# Altium PCB USBHUB.PcbDoc
Units mm, origin at the board's own origin, x right, y up, seen from the top; angles counter-clockwise.
Board outline 100 x 100 mm, 2 copper layers (Top Layer, Bottom Layer); 299 components, 113 nets, 845 pads, 26 vias.
Unrouted connection lines stored in the file: 500.
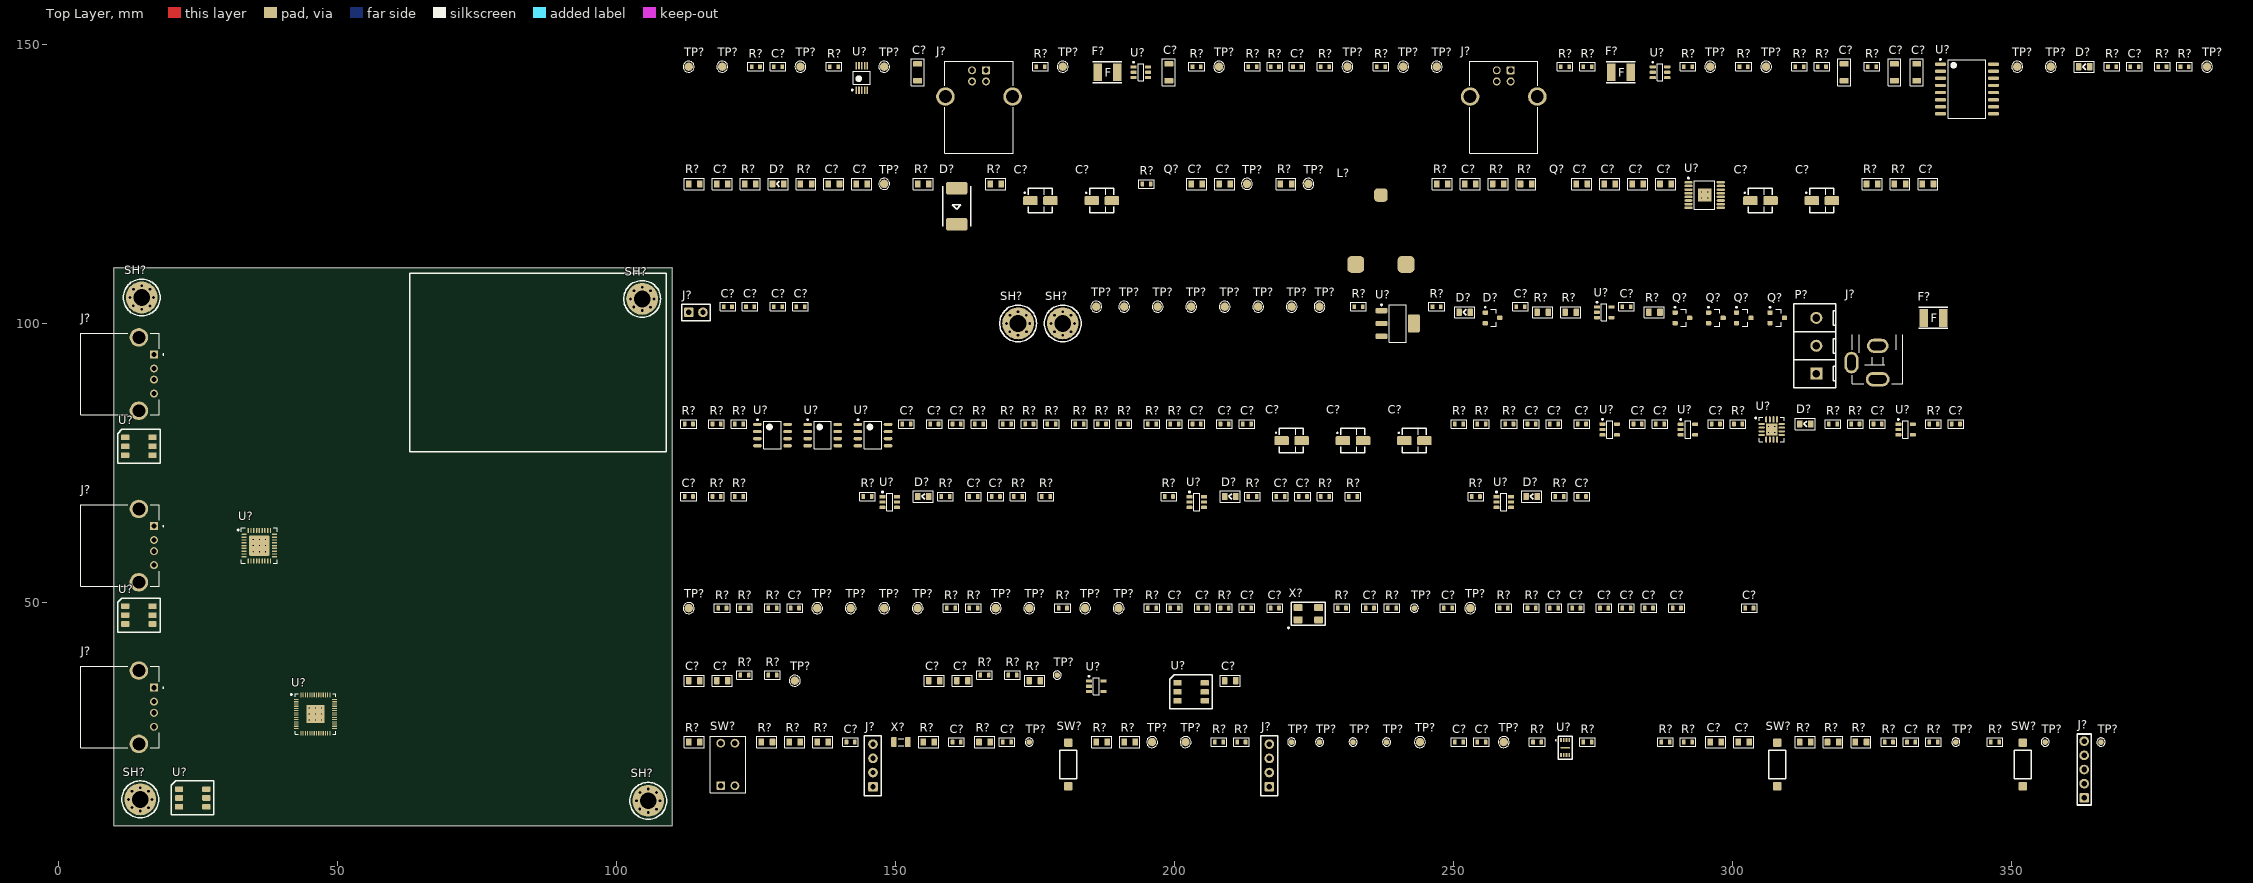
[diagram p0: Top Layer view]
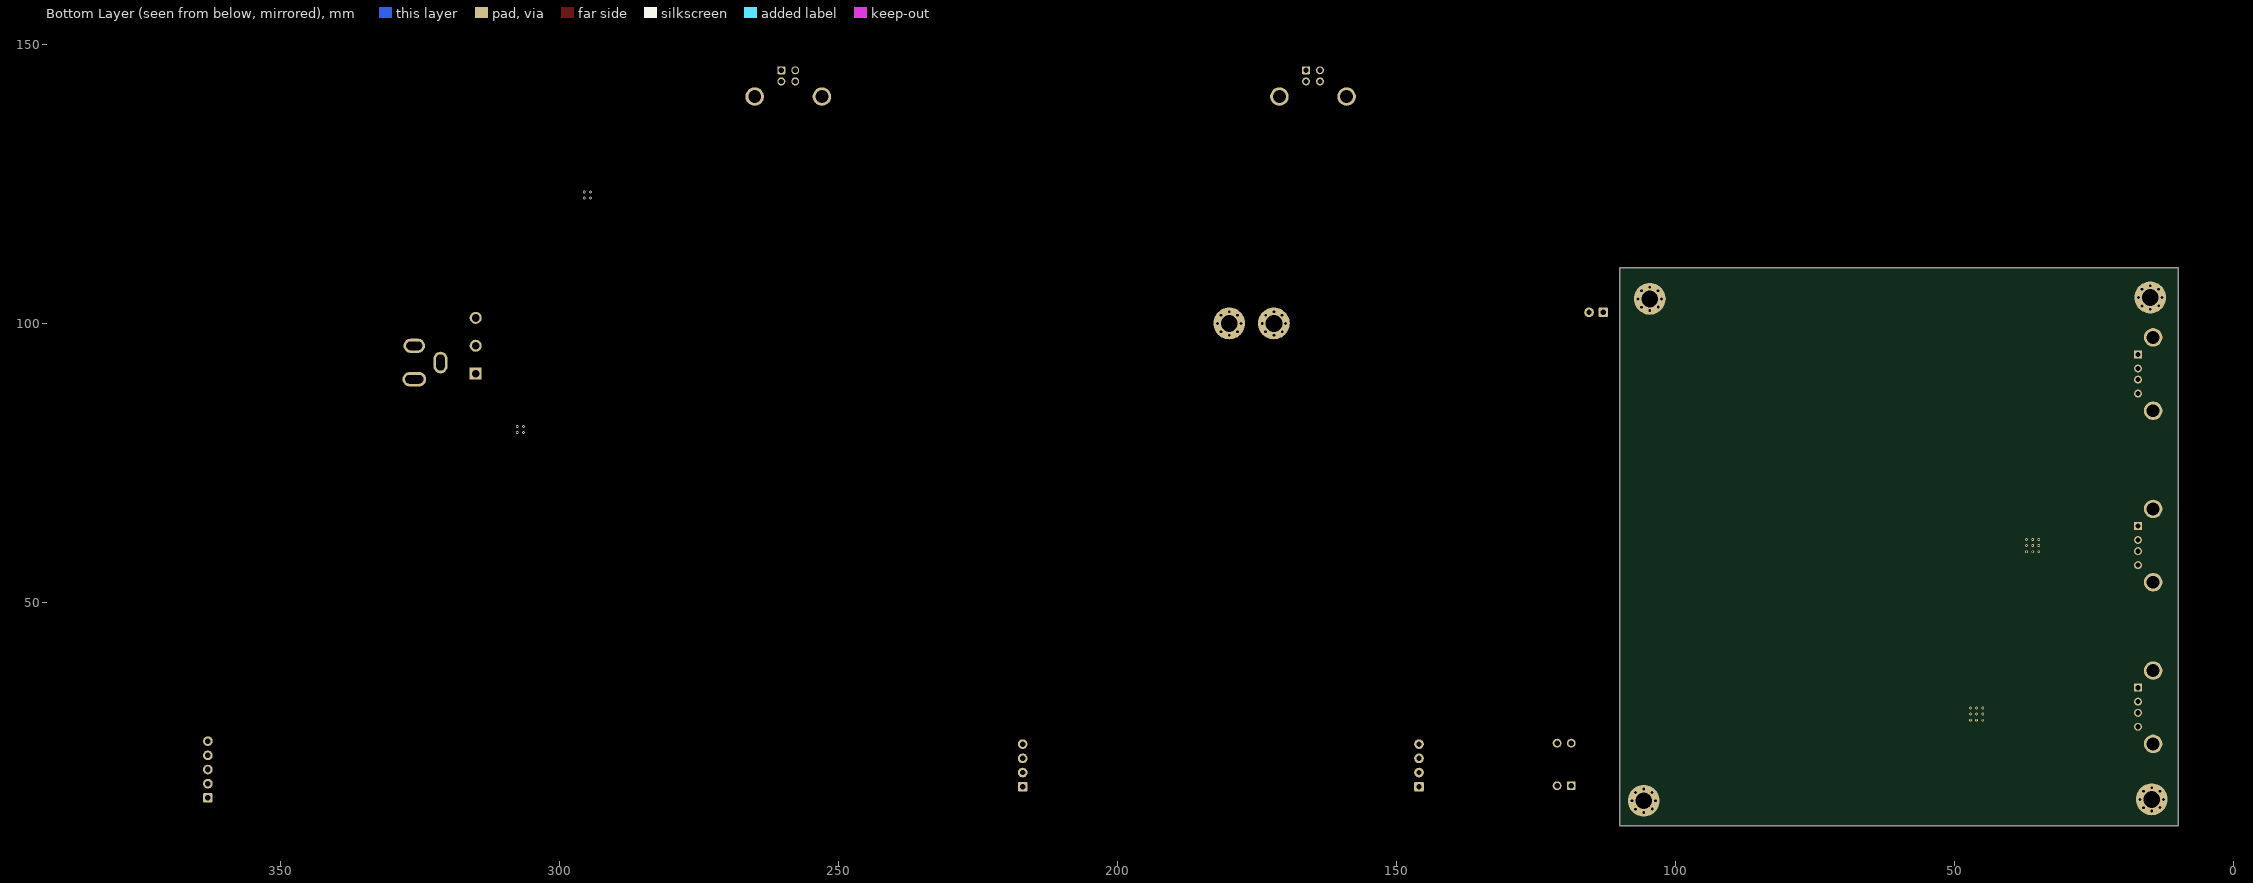
[diagram p1: Bottom Layer view, seen from below]

## Layer stack, top to bottom
Top Solder: solder mask 0.0102, Solder Resist, Dk 3.5
Top Layer: signal copper 0.0356
Dielectric 1: dielectric 0.32, FR-4, Dk 4.8
Bottom Layer: signal copper 0.0356
Bottom Solder: solder mask 0.0102, Solder Resist, Dk 3.5

## Board outline
10,10 110,10 110,110 10,110

## Design rules (kind name [scope] priority, off if disabled: settings)
Clearance [All] p1: gap=0.152 ignorepadtopadclearanceinfootprint=FALSE
DiffPairsRouting [All] p1: maxlimit=0.254 minlimit=0.254 mostfreqgap=0.254 toplayer_minwidth=0.381 toplayer_maxwidth=0.381 toplayer_prefwidth=0.381 bottomlayer_minwidth=0.381 bottomlayer_maxwidth=0.381 bottomlayer_prefwidth=0.381 maxuncoupledlength=12.7
HoleSize [All] p1: absolutevalues=TRUE maxlimit=2.54 minlimit=0.381 maxpercent=80.000 minpercent=20.000
PolygonConnect [All] p1: thpad.connectstyle=Relief thpad.reliefconductorwidth=0.254 thpad.reliefentries=4 thpad.polygonreliefangle="90 Angle" thpad.airgapwidth=0.254 smdpad.connectstyle=Relief smdpad.reliefconductorwidth=0.254 smdpad.reliefentries=4 smdpad.polygonreliefangle="90 Angle" smdpad.airgapwidth=0.254 via.connectstyle=Direct via.reliefconductorwidth=0.254 via.reliefentries=4 via.polygonreliefangle="90 Angle" via.airgapwidth=0.254
RoutingVias [All] p1: holewidth=0.711 width=1.27 viastyle="Through Hole" minholewidth=0.711 minwidth=1.27 maxholewidth=0.711 maxwidth=1.27
SolderMaskExpansion [All] p1: expansion=0.102
Width [All] p1: maxlimit=2.54 minlimit=0.152 preferedwidth=0.254
28 further rules are at their usual default settings.

## Classes and differential pairs
component class SMPS: C? D? L? Q? R? TP? U?
component class Decoration: C? R? TP? U?
component class Control: C? J? R? SW? TP? U? X?
component class Hub: C? R? TP? U? X?
component class Ports: C? D? J? R? U?
component class PortSwitch: C? D? R? U12 U?
component class PowerSupply: C? D? F? J? P? Q? R? SH? TP? U?
component class UpstreamPort: C47 C54 C? D? F? J? R62 R66 R72 R? TP27 TP? U17 U?
differential pair USBDN4: +USBDN4_P -USBDN4_N
differential pair PRT.ESD1: +PRT.ESD1_P -PRT.ESD1_N
differential pair PRT.ESD2: +PRT.ESD2_P -PRT.ESD2_N
differential pair PRT.ESD3: +PRT.ESD3_P -PRT.ESD3_N
differential pair PRT.R1: +PRT.R1_P -PRT.R1_N
differential pair PRT.R2: +PRT.R2_P -PRT.R2_N
differential pair PRT.R3: +PRT.R3_P -PRT.R3_N
differential pair USBDN1: +USBDN1_P -USBDN1_N
differential pair USBDN2: +USBDN2_P -USBDN2_N
differential pair USBDN3: +USBDN3_P -USBDN3_N

## Components (designator, comment, footprint, x,y, rotation, side; value= is the part's Value field where it differs from the comment)
C? "100nF" 0603C_RF_M 161,25 r0 top
C? "100n" 0603C_RF_M 255,25 r0 top
C? "2u2" 0603C_RF_M 251,25 r0 top
C? "2u2" 0805C_RF_M 297,25 r0 top
C? "100n" 0805C_RF_M 302,25 r0 top
C? "100nF" 0603C_RF_M 332,25 r0 top
C? "15pF" 0603C_RF_M 170,25 r0 top
C? "15pF" 0603C_RF_M 142,25 r0 top
C? "100n" 0805C_RF_M 114,36 r0 top
C? "100n" 0805C_RF_M 157,36 r0 top
C? "100n" 0805C_RF_M 210,36 r0 top
C? "100n" 0805C_RF_M 162,36 r0 top
C? "100n" 0805C_RF_M 119,36 r0 top
C? "100nF" 0603C_RF_M 290,49 r0 top
C? "100nF" 0603C_RF_M 285,49 r0 top
C? "100nF" 0603C_RF_M 281,49 r0 top
C? "100nF" 0603C_RF_M 277,49 r0 top
C? "100nF" 0603C_RF_M 272,49 r0 top
C? "100nF" 0603C_RF_M 268,49 r0 top
C? "100nF" 0603C_RF_M 249,49 r0 top
C? "18pF" 0603C_RF_M 213,49 r0 top
C? "18pF" 0603C_RF_M 218,49 r0 top
C? "1nF" 0603C_RF_M 235,49 r0 top
C? "100nF" 0603C_RF_M 205,49 r0 top
C? "100nF" 0603C_RF_M 200,49 r0 top
C? "4.7uF" 0603C_RF_M 303,49 r0 top
C? "100nF" 0603C_RF_M 132,49 r0 top
C? "1nF" 0603C_RF_M 223,69 r0 top
C? "1nF" 0603C_RF_M 168,69 r0 top
C? "1nF" 0603C_RF_M 113,69 r0 top
C? "100nF" 0603C_RF_M 164,69 r0 top
C? "100nF" 0603C_RF_M 219,69 r0 top
C? "100nF" 0603C_RF_M 273,69 r0 top
C? "100nF" 0603C_RF_M 287,82 r0 top
C? "100nF" 0603C_RF_M 204,82 r0 top
C? "100nF" 0603C_RF_M 264,82 r0 top
C? "100nF" 0603C_RF_M 152,82 r0 top
C? "100nF" 0603C_RF_M 209,82 r0 top
C? "100nF" 0603C_RF_M 268,82 r0 top
C? "100nF" 0603C_RF_M 157,82 r0 top
C? "100nF" 0603C_RF_M 213,82 r0 top
C? "100nF" 0603C_RF_M 273,82 r0 top
C? "100nF" 0603C_RF_M 161,82 r0 top
C? "100nF" 0603C_RF_M 326,82 r0 top
C? "100uF" C_EL_B_4MM_RF_M 221,79 r0 top
C? "100uF" C_EL_B_4MM_RF_M 232,79 r0 top
C? "100uF" C_EL_B_4MM_RF_M 243,79 r0 top
C? "100nF" 0603C_RF_M 340,82 r0 top
C? "100nF" 0603C_RF_M 297,82 r0 top
C? "100nF" 0603C_RF_M 283,82 r0 top
C? "1nF" 0603C_RF_M 129,103 r0 top
C? "100nF" 0603C_RF_M 124,103 r0 top
C? "1nF" 0603C_RF_M 120,103 r0 top
C? "100nF" 0603C_RF_M 133,103 r0 top
C? "100nF" 0603C_RF_M 281,103 r0 top
C? "100nF" 0603C_RF_M 262,103 r0 top
C? "330u" C_EL_B_4MM_RF_M 305,122 r0 top
C? "330u" C_EL_B_4MM_RF_M 316,122 r0 top
C? "1u" 0805C_RF_M 253,125 r0 top
C? "33n" 0805C_RF_M 204,125 r0 top
C? "330pF" 0805C_RF_M 144,125 r0 top
C? "22pF" 0805C_RF_M 119,125 r0 top
C? "100pF" 0805C_RF_M 335,125 r0 top
C? "100nF" 0805C_RF_M 273,125 r0 top
C? "22uF" 0805C_RF_M 288,125 r0 top
C? "22uF" 0805C_RF_M 283,125 r0 top
C? "1uF" 0805C_RF_M 278,125 r0 top
C? "1uF" 0805C_RF_M 209,125 r0 top
C? "330pF" 0805C_RF_M 139,125 r0 top
C? "330u" C_EL_B_4MM_RF_M 176,122 r0 top
C? "330u" C_EL_B_4MM_RF_M 187,122 r0 top
C? "1nF" 0603C_RF_M 222,146 r0 top
C? "100nF" 1206C_RF_M 320,145 r90 top
C? "100nF" 0603C_RF_M 372,146 r0 top
C? "100nF" 1206C_RF_M 329,145 r90 top
C? "100nF" 1206C_RF_M 333,145 r90 top
C? "1nF" 0603C_RF_M 129,146 r0 top
C? "100nF" 1206C_RF_M 199,145 r90 top
C? "100nF" 1206C_RF_M 154,145 r90 top
D? "Unspecified" 0805LED_RF_M 155,69 r0 top
D? "Unspecified" 0805LED_RF_M 210,69 r0 top
D? "Unspecified" 0805LED_RF_M 264,69 r0 top
D? "Unspecified" 0805LED_RF_M 313,82 r0 top
D? "LED" 0805LED_RF_M 252,102 r0 top
D? "BAT54C" IRLML_SOT-23 257,101 r0 top
D? "Schottky" ONSEMI_DO214AB_RF_M 161,121 r90 top
D? "LED" 0805LED_RF_M 129,125 r0 top
D? "Unspecified" 0805LED_RF_M 363,146 r0 top
F? "3A" BOURNS_MF-MSMF110/16-2_RF_H 336,101 r0 top
F? "100 mA" BOURNS_MF-MSMF110/16-2_RF_H 280,145 r0 top
F? "500 mA" BOURNS_MF-MSMF110/16-2_RF_H 188,145 r0 top
J? "I2CEXT" HEADER-2.54-4P1 217,17 r90 top
J? "SWD" HEADER-2.54-5P1 363,15 r90 top
J? "Console" HEADER-2.54-4P1 146,17 r90 top
J? "USBDN1" SAMTEC_USB-A-S-X-X-TH 14.478,31.242 r270 top
J? "USBDN2" SAMTEC_USB-A-S-X-X-TH 14.478,60.198 r270 top
J? "USBDN3" SAMTEC_USB-A-S-X-X-TH 14.478,90.932 r270 top
J? "PINHDR_2x1" HEADER-2.54-2P1 113,102 r0 top
J? "DC12V IN" "CON JACK PWR 2.5mm PJ-002BH - duplicate" 326,90 r90 top
J? "USB-1-UP-ISOL" UJ2-BH-2-TH 259,143 r0 top
J? "USB-2-UP" UJ2-BH-2-TH 165,143 r0 top
L? "6.1 uH" CDEP147 237,117 r0 top
P? "ED500XDS-3" ED500XDS-3 315,91 r90 top
Q? "PMV65XP-215" IRLML_SOT-23 291,101 r0 top
Q? "PMV65XP-215" IRLML_SOT-23 297,101 r0 top
Q? "PMV65XP-215" IRLML_SOT-23 302,101 r0 top
Q? "PMV65XP-215" IRLML_SOT-23 308,101 r0 top
Q? "TPCA8053-H" DFN-8 267,126 r90 top
Q? "TPCA8053-H" DFN-8 198,126 r90 top
R? "10K" 0603R_RF_M 292,25 r0 top
R? "10K" 0603R_RF_M 288,25 r0 top
R? "22R" 0805R_RF_M 318,25 r0 top
R? "22R" 0805R_RF_M 313,25 r0 top
R? "10K" 0805R_RF_M 187,25 r0 top
R? "1K" 0603R_RF_M 274,25 r0 top
R? "D.N.P." 0603R_RF_M 265,25 r0 top
R? "33R" 0805R_RF_M 137,25 r0 top
R? "33R" 0805R_RF_M 132,25 r0 top
R? "200R" 0805R_RF_M 323,25 r0 top
R? "0R" 0603R_RF_M 328,25 r0 top
R? "56K" 0603R_RF_M 347,25 r0 top
R? "1K" 0603R_RF_M 336,25 r0 top
R? "10K" 0805R_RF_M 127,25 r0 top
R? "10K" 0805R_RF_M 114,25 r0 top
R? "0R" 0805R_RF_M 166,25 r0 top
R? "1M" 0805R_RF_M 156,25 r0 top
R? "0R" 0805R_RF_M 192,25 r0 top
R? "10K" 0603R_RF_M 212,25 r0 top
R? "10K" 0603R_RF_M 208,25 r0 top
R? "150R" 0603R_RF_M 123,37 r0 top
R? "150R" 0603R_RF_M 166,37 r0 top
R? "33R" 0805R_RF_M 175,36 r0 top
R? "150R" 0603R_RF_M 171,37 r0 top
R? "150R" 0603R_RF_M 128,37 r0 top
R? "10K" 0603R_RF_M 264,49 r0 top
R? "1M" 0603R_RF_M 239,49 r0 top
R? "12K" 0603R_RF_M 196,49 r0 top
R? "100K" 0603R_RF_M 259,49 r0 top
R? "100K" 0603R_RF_M 230,49 r0 top
R? "10K" 0603R_RF_M 160,49 r0 top
R? "10K" 0603R_RF_M 164,49 r0 top
R? "10K" 0603R_RF_M 180,49 r0 top
R? "0R" 0603R_RF_M 128,49 r0 top
R? "0R" 0603R_RF_M 123,49 r0 top
R? "10K" 0603R_RF_M 119,49 r0 top
R? "10K" 0603R_RF_M 209,49 r0 top
R? "1M" 0603R_RF_M 227,69 r0 top
R? "0R" 0603R_RF_M 254,69 r0 top
R? "0R" 0603R_RF_M 232,69 r0 top
R? "1M" 0603R_RF_M 172,69 r0 top
R? "0R" 0603R_RF_M 199,69 r0 top
R? "0R" 0603R_RF_M 177,69 r0 top
R? "1M" 0603R_RF_M 118,69 r0 top
R? "0R" 0603R_RF_M 145,69 r0 top
R? "0R" 0603R_RF_M 122,69 r0 top
R? "1K" 0603R_RF_M 159,69 r0 top
R? "1K" 0603R_RF_M 214,69 r0 top
R? "1K" 0603R_RF_M 269,69 r0 top
R? "0R1" 0603R_RF_M 191,82 r0 top
R? "0R" 0603R_RF_M 251,82 r0 top
R? "0R" 0603R_RF_M 170,82 r0 top
R? "33K" 0603R_RF_M 113,82 r0 top
R? "33K" 0603R_RF_M 165,82 r0 top
R? "0R1" 0603R_RF_M 196,82 r0 top
R? "0R" 0603R_RF_M 255,82 r0 top
R? "0R" 0603R_RF_M 178,82 r0 top
R? "33K" 0603R_RF_M 118,82 r0 top
R? "33K" 0603R_RF_M 174,82 r0 top
R? "0R1" 0603R_RF_M 200,82 r0 top
R? "0R" 0603R_RF_M 260,82 r0 top
R? "0R" 0603R_RF_M 187,82 r0 top
R? "33K" 0603R_RF_M 122,82 r0 top
R? "33K" 0603R_RF_M 183,82 r0 top
R? "10K" 0603R_RF_M 301,82 r0 top
R? "0R" 0603R_RF_M 322,82 r0 top
R? "10K" 0603R_RF_M 318,82 r0 top
R? "1K" 0603R_RF_M 336,82 r0 top
R? "560R" 0603R_RF_M 247,103 r0 top
R? "10K" 0805R_RF_M 286,102 r0 top
R? "56K" 0805R_RF_M 271,102 r0 top
R? "56K" 0805R_RF_M 266,102 r0 top
R? "0R" 0603R_RF_M 233,103 r0 top
R? "71K5" 0805R_RF_M 325,125 r0 top
R? "169K" 0805R_RF_M 248,125 r0 top
R? "1K" 0805R_RF_M 258,125 r0 top
R? "97K6" 0805R_RF_M 134,125 r0 top
R? "18K7" 0805R_RF_M 330,125 r0 top
R? "0R" 0805R_RF_M 263,125 r0 top
R? "0R" 0805R_RF_M 155,125 r0 top
R? "6K49" 0805R_RF_M 168,125 r0 top
R? "26K7" 0805R_RF_M 114,125 r0 top
R? "100K" 0805R_RF_M 124,125 r0 top
R? "1K" 0603R_RF_M 195,125 r0 top
R? "0R" 0805R_RF_M 220,125 r0 top
R? "1M" 0603R_RF_M 218,146 r0 top
R? "0R" 0603R_RF_M 270,146 r0 top
R? "0R" 0603R_RF_M 227,146 r0 top
R? "? R" 0603R_RF_M 377,146 r0 top
R? "? R" 0603R_RF_M 368,146 r0 top
R? "10K" 0603R_RF_M 381,146 r0 top
R? "20K" 0603R_RF_M 292,146 r0 top
R? "20K" 0603R_RF_M 312,146 r0 top
R? "1M" 0603R_RF_M 125,146 r0 top
R? "0R" 0603R_RF_M 176,146 r0 top
R? "0R" 0603R_RF_M 139,146 r0 top
R? "0R" 0603R_RF_M 325,146 r0 top
R? "0R" 0603R_RF_M 302,146 r0 top
R? "0R" 0603R_RF_M 274,146 r0 top
R? "0R" 0603R_RF_M 237,146 r0 top
R? "20K" 0603R_RF_M 316,146 r0 top
R? "0R" 0603R_RF_M 214,146 r0 top
R? "0R" 0603R_RF_M 204,146 r0 top
SH? "SH-30/57" SH\D3.0\S5.7 14.986,104.648 r0 top
SH? "SH-30/57" SH\D3.0\S5.7 14.732,14.732 r0 top
SH? "SH-30/57" SH\D3.0\S5.7 105.732,14.478 r0 top
SH? "SH-30/57" SH\D3.0\S5.7 104.648,104.394 r0 top
SH? "SH-30/57" SH\D3.0\S5.7 172,100 r0 top
SH? "SH-30/57" SH\D3.0\S5.7 180,100 r0 top
SW? "WURTH_418117270902" WURTH_418117270902 120,21 r0 top
SW? "RS-282G05A3-SM" RS-282G05A3-SM 352,21 r90 top
SW? "RS-282G05A3-SM" RS-282G05A3-SM 308,21 r90 top
SW? "RS-282G05A3-SM" RS-282G05A3-SM 181,21 r90 top
TP? "SDA" PAD_R_1.5MM 259,25 r0 top
TP? "SCL" PAD_R_1.5MM 244,25 r0 top
TP? "Test Point" PAD_R_1MM 238,25 r90 top
TP? "Test Point" PAD_R_1MM 232,25 r90 top
TP? "Test Point" PAD_R_1MM 226,25 r90 top
TP? "Test Point" PAD_R_1MM 221,25 r90 top
TP? "Test Point" PAD_R_1MM 174,25 r90 top
TP? "Test Point" PAD_R_1MM 366,25 r90 top
TP? "Test Point" PAD_R_1MM 356,25 r90 top
TP? "Test Point" PAD_R_1MM 340,25 r90 top
TP? "SDA" PAD_R_1.5MM 202,25 r0 top
TP? "SCL" PAD_R_1.5MM 196,25 r0 top
TP? "Test Point" PAD_R_1.5MM 132,36 r0 top
TP? "Test Point" PAD_R_1MM 179,37 r90 top
TP? "EEWP" PAD_R_1.5MM 113,49 r0 top
TP? "Test Point" PAD_R_1.5MM 253,49 r0 top
TP? "Test Point" PAD_R_1.5MM 190,49 r0 top
TP? "Test Point" PAD_R_1.5MM 184,49 r0 top
TP? "Test Point" PAD_R_1.5MM 174,49 r0 top
TP? "Test Point" PAD_R_1.5MM 168,49 r0 top
TP? "Test Point" PAD_R_1.5MM 154,49 r0 top
TP? "Test Point" PAD_R_1.5MM 148,49 r0 top
TP? "Test Point" PAD_R_1.5MM 142,49 r0 top
TP? "Test Point" PAD_R_1.5MM 136,49 r0 top
TP? "Test Point" PAD_R_1MM 243,49 r90 top
TP? "Test Point" PAD_R_1.5MM 209,103 r0 top
TP? "Test Point" PAD_R_1.5MM 215,103 r0 top
TP? "Test Point" PAD_R_1.5MM 221,103 r0 top
TP? "Test Point" PAD_R_1.5MM 226,103 r0 top
TP? "Test Point" PAD_R_1.5MM 197,103 r0 top
TP? "Test Point" PAD_R_1.5MM 203,103 r0 top
TP? "Test Point" PAD_R_1.5MM 186,103 r0 top
TP? "Test Point" PAD_R_1.5MM 191,103 r0 top
TP? "Test Point" PAD_R_1.5MM 224,125 r0 top
TP? "Test Point" PAD_R_1.5MM 148,125 r0 top
TP? "Test Point" PAD_R_1.5MM 213,125 r0 top
TP? "Test Point" PAD_R_1.5MM 296,146 r0 top
TP? "Test Point" PAD_R_1.5MM 148,146 r0 top
TP? "Test Point" PAD_R_1.5MM 133,146 r0 top
TP? "Test Point" PAD_R_1.5MM 231,146 r0 top
TP? "Test Point" PAD_R_1.5MM 208,146 r0 top
TP? "Test Point" PAD_R_1.5MM 247,146 r0 top
TP? "Test Point" PAD_R_1.5MM 241,146 r0 top
TP? "Test Point" PAD_R_1.5MM 357,146 r0 top
TP? "Test Point" PAD_R_1.5MM 180,146 r0 top
TP? "Test Point" PAD_R_1.5MM 385,146 r0 top
TP? "Test Point" PAD_R_1.5MM 113,146 r0 top
TP? "Test Point" PAD_R_1.5MM 119,146 r0 top
TP? "Test Point" PAD_R_1.5MM 351,146 r0 top
TP? "Test Point" PAD_R_1.5MM 306,146 r0 top
U? "RP2040-RP2-B1" RP2040-QFN-56 46.109,30.026 r0 top
U? "W25Q16JV" MCHP_USON-8 270,24 r0 top
U? "WS2812B" WS2812B 14.478,77.978 r0 top
U? "WS2812B" WS2812B 24.13,14.986 r0 top
U? "SN74LVC1G17DBVR" TI_SOT-23-5 186,35 r0 top
U? "WS2812B" WS2812B 203,34 r0 top
U? "WS2812B" WS2812B 14.478,47.752 r0 top
U? "USB2514B-AEZC" MCHP_USB2514B-QFN-36 36.068,60.198 r0 top
U? "USBLC6-2SC6" TI_SOT-23-6 259,68 r0 top
U? "USBLC6-2SC6" TI_SOT-23-6 204,68 r0 top
U? "USBLC6-2SC6" TI_SOT-23-6 149,68 r0 top
U? "SN74LVC1G08DBVR" TI_SOT-23-5 292,81 r0 top
U? "SN74LVC1G08DBVR" TI_SOT-23-5 278,81 r0 top
U? "MIC2075" SOIC-8 128,80 r0 top
U? "MIC2075" SOIC-8 137,80 r0 top
U? "MIC2075" SOIC-8 146,80 r0 top
U? "INA3221" TI_QFN-16_RF_M 307,81 r0 top
U? "SN74LVC1G08DBVR" TI_SOT-23-5 331,81 r0 top
U? "LM1117IMP-3.3" SOT-223 240,100 r0 top
U? "LM397MF" TI_SOT-23-5 277,102 r0 top
U? "TPS40057" TI_HTSSOP-16 295,123 r0 top
U? "ADUM3160" ADUM3160_SOP-16_RF_M 342,142 r0 top
U? "USBLC6-2SC6" TI_SOT-23-6 287,145 r0 top
U? "USBLC6-2SC6" TI_SOT-23-6 194,145 r0 top
U? "TS3USB30EDGSR" TI_VSSOP-10_RF_M 144,144 r90 top
X? "12 MHz" XTAL_3215 151,25 r0 top
X? "24 MHz" XTAL_5032 224,48 r0 top

## Footprints (in the part's own frame and the unit in brackets; to place one, negate y for a bottom-side part, rotate by r counter-clockwise, add the part's x,y. Pads: shape width x height; smd on the part's side, far side on the other; paste and mask are expansions set on the pad)
0603C_RF_M [mm] "Chip Capacitor 0603 Reflow Medium"
  rrect25% 0.65x0.85 smd: 1(-0.75,0) 2(0.75,0)
  silkscreen extent -1.4,-0.76 1.4,0.76, body extent -0.8,-0.4 0.8,0.41, height 0.9
0603R_RF_M [mm] "Chip Resistor 0603 Reflow Medium"
  rrect25% 0.65x0.85 smd: 1(-0.75,0) 2(0.75,0)
  silkscreen extent -1.4,-0.76 1.4,0.76, body extent -0.8,-0.4 0.8,0.4, height 0.55
0805C_RF_M [mm] "Chip Capacitor 0805 Reflow Medium"
  rrect25% 1x1.3 smd: 1(-1,0) 2(1,0)
  silkscreen extent -1.78,-1.02 1.78,1.02, body extent -1,-0.62 1.01,0.63, height 0.94
0805LED_RF_M [mm] "Chip LED 0805 Reflow Medium"
  rrect25% 1x1.3 smd: A(1,0) C(-1,0)
  silkscreen extent -1.78,-1.02 1.78,1.02, body extent -1,-0.62 1,0.63, height 0.7
0805R_RF_M [mm] "Chip Resistor 0805 Reflow Medium"
  rrect25% 1x1.3 smd: 1(-1,0) 2(1,0)
  silkscreen extent -1.78,-1.02 1.78,1.02, body extent -1,-0.62 1,0.63, height 0.6
1206C_RF_M [mm] "Chip Capacitor 1206 Reflow Medium"
  rrect25% 1x1.6 smd: 1(-1.5,0) 2(1.5,0)
  silkscreen extent -2.41,-1.14 2.41,1.14, body extent -1.6,-0.8 1.6,0.8, height 0.94
ADUM3160_SOP-16_RF_M [mm] "16-Lead Standard Small Outline Package [SOIC-W] Wide Body [RW-16]"
  rrect50% 1.9x0.6 smd: 1(-4.75,4.445) 2(-4.75,3.175) 3(-4.75,1.905) 4(-4.75,0.635) 5(-4.75,-0.635) 6(-4.75,-1.905) 7(-4.75,-3.175) 8(-4.75,-4.445) 9(4.75,-4.445) 10(4.75,-3.175) 11(4.75,-1.905) 12(4.75,-0.635) 13(4.75,0.635) 14(4.75,1.905) 15(4.75,3.175) 16(4.75,4.445)
  silkscreen extent -4.87,-5.25 3.4,5.42, body extent -5.16,-5.25 5.16,5.25, height 2.65
BOURNS_MF-MSMF110/16-2_RF_H [mil] "PTC RESET FUSE SMD 1812"
  rect 60x126 smd: 1(-68,0) 2(68,0)
  silkscreen extent -103,-75 102,75, body extent -88,-64 92,64, height 26
C_EL_B_4MM_RF_M [mm] "Electrolytic Capacitor SMD Size B 4mm OD"
  rrect25% 2.6x1.6 smd: N(1.8,0) P(-1.8,0)
  silkscreen extent -2.88,-2.2 2.1,2.2, body extent -2.35,-2.17 2.25,2.13, height 3.91
CDEP147 [mm] "SMD Power Inductor 14.9x14.9x8-mm Reflow"
  rrect50% 3x3 smd: 1(-4.5,-6.425) 2(4.5,-6.425)
  rrect50% 2.4x2.4 smd: MO(0,6)
  body extent -7.25,-7.5 7.25,7, height 8
"CON JACK PWR 2.5mm PJ-002BH - duplicate" [mil] "Connector, Power Jack, 2.5 mm x 5.1 mm, 24 V, 5 A, Right Angle, TH"
  oval 100x167.95 hole 60 slot 127.95 at 90 deg: 1(0,0)
  oval 100x152.2 hole 60 slot 112.2 at 90 deg: 2(236,0)
  oval 152.2x100 hole 60 slot 112.2 at 0 deg: 3(118,185)
  silkscreen extent -32,-178 315,178, body extent -29,-177 537,193, height 435
DFN-8 [mm] "DFN 8 Leads 5x6mm Reflow"
ED500XDS-3 [mil]
  rect 85x85 hole 55: 1(0,0)
  round 85 hole 55: 2(196.85,0) 3(393.7,0)
  silkscreen extent -99,-138 492,157, body extent -99,-138 492,157, height 395
HEADER-2.54-2P1 [mil] "Pin Header Single Row 2 Positions Pitch 2.54 mm"
  rrect30% 68x68 hole 38: 1(0,0)
  round 68 hole 38: 2(100,0)
  silkscreen extent -50,-60 150,55, body extent -42,-50 142,45, height 331
HEADER-2.54-4P1 [mil] "Pin Header Single Row 4 Positions Pitch 2.54 mm"
  rrect30% 68x68 hole 38: 1(0,0)
  round 68 hole 38: 2(100,0) 3(200,0) 4(300,0)
  silkscreen extent -65,-60 360,60, body extent -55,-50 350,50, height 332
HEADER-2.54-5P1 [mil] "Pin Header Single Row 5 Positions Pitch 2.54 mm"
  rrect30% 68x68 hole 40: 1(0,0)
  round 68 hole 40: 2(100,0) 3(200,0) 4(300,0) 5(400,0)
  silkscreen extent -50,-50 450,50
IRLML_SOT-23 [mm] "Infineon's IRLML Series Logic-Level Transistor SOT-23"
  rrect50% 0.97x0.8 smd: 1(-1.3,0.95) 2(-1.3,-0.95) 3(1.3,0)
  silkscreen extent -1.42,-1.5 0.7,2.02, body extent -1.32,-1.52 1.32,1.52, height 1.12
MCHP_USB2514B-QFN-36 [mm]
  rrect50% 0.9x0.25 smd: 1(-2.725,2) 2(-2.725,1.5) 3(-2.725,1) 4(-2.725,0.5) 5(-2.725,0) 6(-2.725,-0.5) 7(-2.725,-1) 8(-2.725,-1.5) 9(-2.725,-2) 19(2.725,-2) 20(2.725,-1.5) 21(2.725,-1) 22(2.725,-0.5) 23(2.725,0) 24(2.725,0.5) 25(2.725,1) 26(2.725,1.5) 27(2.725,2)
  rrect50% 0.25x0.9 smd: 10(-2,-2.725) 11(-1.5,-2.725) 12(-1,-2.725) 13(-0.5,-2.725) 14(0,-2.725) 15(0.5,-2.725) 16(1,-2.725) 17(1.5,-2.725) 18(2,-2.725) 28(2,2.725) 29(1.5,2.725) 30(1,2.725) 31(0.5,2.725) 32(0,2.725) 33(-0.5,2.725) 34(-1,2.725) 35(-1.5,2.725) 36(-2,2.725)
  rrect15% 3.7x3.7 smd: 37(0,0)
  silkscreen extent -3.93,-3.2 3.2,3.2, body extent -3.1,-3.1 3.1,3.1, height 0.9
MCHP_USON-8 [mm] "USON-8 [UDFN-8] 2x3mm"
  rect 0.3x0.7 smd: 1(-0.75,1.35) 2(-0.25,1.35) 3(0.25,1.35) 4(0.75,1.35) 5(0.75,-1.35) 6(0.25,-1.35) 7(-0.25,-1.35) 8(-0.75,-1.35)
  rect 1.7x0.3 smd: PAD(0,0)
  silkscreen extent -1.73,-2.03 1.27,2.03, body extent -1,-1.5 1,1.5, height 0.58
ONSEMI_DO214AB_RF_M [mil] "Diode DO-214AB (SMC)"
  rrect30% 90x150 smd: A(127.5,0) C(-127.5,0)
  silkscreen extent -140,-100 140,100, body extent -156,-116 157,116, height 103
PAD_R_1.5MM [mm] "Pad Rounded 1.5mm"
  round 1.5 smd paste-10: 1(0,0)
  silkscreen extent -0.99,-0.99 0.99,0.99
PAD_R_1MM [mm] "Pad Rounded 1mm"
  round 1 smd paste-10: 1(0,0)
  silkscreen extent -0.74,-0.74 0.74,0.73
RP2040-QFN-56 [mm]
  oval 0.875x0.2 smd: 1(-3.437,2.6) 2(-3.437,2.2) 3(-3.437,1.8) 4(-3.437,1.4) 5(-3.437,1) 6(-3.437,0.6) 7(-3.437,0.2) 8(-3.437,-0.2) 9(-3.437,-0.6) 10(-3.437,-1) 11(-3.437,-1.4) 12(-3.437,-1.8) 13(-3.437,-2.2) 14(-3.437,-2.6) 29(3.438,-2.6) 30(3.438,-2.2) 31(3.438,-1.8) 32(3.438,-1.4) 33(3.438,-1) 34(3.438,-0.6) 35(3.438,-0.2) 36(3.438,0.2) 37(3.438,0.6) 38(3.438,1) 39(3.438,1.4) 40(3.438,1.8) 41(3.438,2.2) 42(3.438,2.6)
  oval 0.2x0.875 smd: 15(-2.6,-3.438) 16(-2.2,-3.438) 17(-1.8,-3.438) 18(-1.4,-3.438) 19(-1,-3.438) 20(-0.6,-3.438) 21(-0.2,-3.438) 22(0.2,-3.438) 23(0.6,-3.438) 24(1,-3.438) 25(1.4,-3.438) 26(1.8,-3.438) 27(2.2,-3.438) 28(2.6,-3.438) 43(2.6,3.437) 44(2.2,3.437) 45(1.8,3.437) 46(1.4,3.437) 47(1,3.437) 48(0.6,3.437) 49(0.2,3.437) 50(-0.2,3.437) 51(-0.6,3.437) 52(-1,3.437) 53(-1.4,3.437) 54(-1.8,3.437) 55(-2.2,3.437) 56(-2.6,3.437)
  rect 3.2x3.2 smd: 57(0,0)
  silkscreen extent -4.42,-3.65 3.65,3.65, body extent -3.55,-3.55 3.55,3.55, height 0.9
RS-282G05A3-SM [mil] "SWITCH TACTILE SPST-NO 0.05A 12V"
  rrect30% 60x60 smd: 1(-153.54,0) 2(153.54,0)
  silkscreen extent -100,-60 100,60, body extent -157,-71 157,71, height 99
SAMTEC_USB-A-S-X-X-TH [mm] "CONN RCPT USB2.0 TYPEA 4POS RA"
  rect 1.428x1.428 hole 0.92: 1(-3.5,2.71)
  round 1.428 hole 0.92: 2(-1,2.71) 3(1,2.71) 4(3.5,2.71)
  round 3.316 hole 2.3: SH(-6.57,0) SH(6.57,0)
  silkscreen extent -7.3,-10.4 7.3,4.5, body extent -7.87,-10.35 7.87,3.75, height 7.47
SH\D3.0\S5.7 [mm] "Screw Hole D3.0/5.7 T/B"
  round 0.7 hole 0.5: 1(-2.1,0) 1(-1.499,-1.473) 1(-1.473,1.473) 1(0,-2.1) 1(0,2.1) 1(1.473,1.473) 1(1.499,-1.499) 1(2.1,0)
  round 5.7 hole 3: 1(0,0)
  silkscreen extent -3.3,-3.3 3.3,3.3
SOIC-8 [mm]
  oval 1.55x0.6 smd: 1(-2.7,1.905) 2(-2.7,0.635) 3(-2.7,-0.635) 4(-2.7,-1.905) 5(2.7,-1.905) 6(2.7,-0.635) 7(2.7,0.635) 8(2.7,1.905)
  silkscreen extent -2.82,-2.45 1.55,2.88, body extent -1.95,-2.45 1.95,2.45, height 1.75
SOT-223 [mm] "SOT-223: 4 Leads; Tab Not Connected"
  rrect50% 2.15x0.95 smd: 1(-2.9,2.3) 2(-2.9,0) 3(-2.9,-2.3)
  rrect25% 2.15x3.25 smd: 4(2.9,0)
  silkscreen extent -3.02,-3.35 1.55,3.45, body extent -3.5,-3.35 3.5,3.35, height 1.8
TI_HTSSOP-16 [mm] "Texas Instruments HTSSOP-16 (PowerPAD TSSOP) Reflow Medium Density"
  oval 1.5x0.45 smd: 1(-2.9,2.275) 2(-2.9,1.625) 3(-2.9,0.975) 4(-2.9,0.325) 5(-2.9,-0.325) 6(-2.9,-0.975) 7(-2.9,-1.625) 8(-2.9,-2.275) 9(2.9,-2.275) 10(2.9,-1.625) 11(2.9,-0.975) 12(2.9,-0.325) 13(2.9,0.325) 14(2.9,0.975) 15(2.9,1.625) 16(2.9,2.275)
  rect 2.46x2.31 smd: 17(0,0)
  silkscreen extent -3.02,-2.55 1.85,3.17, body extent -3.2,-2.55 3.2,2.55, height 1.2
TI_QFN-16_RF_M [mm] "Texas Instruments QFN-16 (S-PVQFN-16) Reflow Medium Density"
  oval 1.15x0.35 smd: 1(-1.8,0.975) 2(-1.8,0.325) 3(-1.8,-0.325) 4(-1.8,-0.975) 9(1.8,-0.975) 10(1.8,-0.325) 11(1.8,0.325) 12(1.8,0.975)
  oval 0.35x1.15 smd: 5(-0.975,-1.8) 6(-0.325,-1.8) 7(0.325,-1.8) 8(0.975,-1.8) 13(0.975,1.8) 14(0.325,1.8) 15(-0.325,1.8) 16(-0.975,1.8)
  rect 2.1x2.1 smd: 17(0,0)
  silkscreen extent -3,-2.23 2.23,2.22, body extent -2.12,-2.12 2.12,2.12, height 1
TI_SOT-23-5 [mm]
  rrect50% 1.1x0.6 smd: 1(-1.3,0.95) 2(-1.3,0) 3(-1.3,-0.95) 4(1.3,-0.95) 5(1.3,0.95)
  silkscreen extent -1.42,-1.55 0.5,1.92, body extent -1.5,-1.53 1.5,1.53, height 1.45
TI_SOT-23-6 [mm]
  rrect50% 1.1x0.6 smd: 1(-1.3,0.95) 2(-1.3,0) 3(-1.3,-0.95) 4(1.3,-0.95) 5(1.3,0) 6(1.3,0.95)
  silkscreen extent -1.42,-1.55 0.5,1.92, body extent -1.5,-1.52 1.5,1.53, height 1.45
TI_VSSOP-10_RF_M [mm] "Texas Instruments VSSOP-10 DGS0010A Reflow Medium Density"
  rrect50% 1.35x0.3 smd: 1(-2.2,1) 2(-2.2,0.5) 3(-2.2,0) 4(-2.2,-0.5) 5(-2.2,-1) 6(2.2,-1) 7(2.2,-0.5) 8(2.2,0) 9(2.2,0.5) 10(2.2,1)
  silkscreen extent -2.32,-1.55 1.15,1.82, body extent -2.45,-1.55 2.45,1.55, height 1.1
UJ2-BH-2-TH [mm] "USB 2.0 Type B Receptacle (CUI UJ2-BH-2-TH)"
  rrect30% 1.428x1.428 hole 0.92: 1(1.25,2.355)
  round 1.428 hole 0.92: 2(-1.25,2.355) 3(-1.25,0.355) 4(1.25,0.355)
  round 3.316 hole 2.3: SH(-6.02,-2.355) SH(6.02,-2.355)
  silkscreen extent -6.1,-12.51 6.1,3.99, body extent -7.52,-12.47 7.48,3.98, height 11.1
WS2812B [mm]
  rrect30% 1.5x1 smd: 1(-2.45,1.6) 2(-2.45,0) 3(-2.45,-1.6) 4(2.45,-1.6) 5(2.45,0) 6(2.45,1.6)
  silkscreen extent -3.81,-3.05 3.81,3.05, body extent -2.7,-2.47 2.7,2.48, height 1.6
WURTH_418117270902 [mm] "DIP SWITCH SPST 2.54 PITCH RA"
  rrect30% 1.58x1.58 hole 1: 1A(-1.27,-3.81)
  round 1.58 hole 1: 1B(-1.27,3.81) 2A(1.27,-3.81) 2B(1.27,3.81)
  silkscreen extent -3.17,-5.08 3.17,5.08, body extent -3.04,-4.95 3.04,4.95, height 6.45
XTAL_3215 [mm] "Crystal SMD 3.2x1.5mm 2-Flat Leads"
  rrect30% 1x1.8 smd: 1(-1.25,0) 2(1.25,0)
  silkscreen extent -0.51,-0.64 0.51,0.64, body extent -1.6,-0.75 1.6,0.75, height 0.9
XTAL_5032 [mm] "ECX-53BQ: 4-SMD No Lead"
  rrect25% 1.6x1.25 smd: 1(-1.85,-1.1) 2(1.85,-1.1) 3(1.85,1.1) 4(-1.85,1.1)
  silkscreen extent -3.68,-2.67 3.05,2.03, body extent -2.5,-1.6 2.5,1.6, height 0.85

## Part data
C? C? C? C? C? C? C? C? C? C? C? C? C? C? C? C? C? C? C? C? C? C? C? C? C? C? C? C? C? C? C? C? C? C? C? C? C? C? C? C? C? C? C? C? C? C? C? C? C? C? C? C? C? C? C? C? C? C? C? C? C? C? C? C? C? C? C? C? C? C? C? C?: library part C, "Capacitor", Manufacturer="Generic Brand", Max Voltage="? V", Tolerance=?, Category=Capacitor, Mounting Technology=SMT, Supplier Link=http://
C? C? C? C? C? C? C?: library part C-P, "Polarized Capacitor", Manufacturer="Generic Brand", Max Voltage="? V", Tolerance=?, Category=Capacitor, Mounting Technology=SMT, Supplier Link=http://
D? D? D? D? D?: library part LED, "LED", Forward Voltage Drop="? V", Manufacturer="Generic Brand", Category=Diode, Emitting Color=Unspecified, Mounting Technology=SMT, Supplier Link=http://
D? D?: Emitting Color=Unspecified, Forward Voltage Drop="? V", Manufacturer="Generic Brand", Category=Diode, Mounting Technology=SMT, Supplier Link=http://
D?: "DIODE ARRAY SCHOTTKY COMM CATH 30V 0.2A SOT-23", Manufacturer="Diodes Incorporated", Package=SOT-23-3, PartNo=BAT54C-FDICT-ND, BaseProduct=BAT54C, DiodeConfiguration="1 Pair Common Cathode", MountingTechnology=SMT, ProductNumber=BAT54C-7-F, Supplier=DigiKey, UnitPrice=$0.18, URL=https://www.digikey.com/en/products/detail/diodes-incorporated/BAT54C-7-F/717701
D?: library part D-SCHOTTKY, "Schottky Diode", Manufacturer="Generic Brand", Max Forward Voltage="? V", Power Rating="? W", Category=Diode, Mounting Technology=SMT, Supplier Link=http://
F? F? F?: library part PPTC, "Resettable Fuse", Manufacturer="Generic Brand", Max Voltage="? V", Category=Fuse, Mounting Technology=SMT, Supplier Link=http://
  F?: Hold Current=3A
  F?: Hold Current="100 mA"
  F?: Hold Current="500 mA"
J? J?: library part PINHDR-4P1, "Generic Pin Header 4x1"
J?: library part PINHDR-5P1, "Generic Pin Header 5x1"
J? J? J?: library part USB-A-S-S-W-TH, "CONN RCPT USB2.0 TYPEA 4POS R/A", Manufacturer="Samtec Inc.", Supplier Part No=SAM10373-ND, Mounting Type=THT, Product Number=USB-A-S-S-W-TH, Supplier=DigiKey, Supplier Link=https://www.digikey.com/en/products/detail/samtec-inc/USB-A-S-S-W-TH/6679110
J?: "Generic Pin Header 2x1"
J?: library part PJ-002BH, "CONN PWR JACK 2.5X5.5MM SOLDER", Manufacturer="CUI Devices", PartNo=CP-002BH-ND, MountType=THT, ProductNumber=PJ-002BH, Supplier=DigiKey, UnitPrice=$0.74, URL=https://www.digikey.com/en/products/detail/cui-devices/PJ-002BH/408447
J? J?: library part USBB-1J, "USB Type B Receptacle", Case="USB Type B", Manufacturer=Connfly, Supplier Part No=249636968, Mounting Type=THT, Product Number="USBB-1J (DS1099-WN0)", Supplier=Chipdip, Supplier Link=https://www.chipdip.by/product/usbb-1j
L?: library part CDEP147NP-6R1MC-125, "FIXED IND 6.1UH 12.5A 6.03 MOHM", Manufacturer="Sumida America Components Inc.", Package=Non-Standard, Supplier Part No=CDEP147NP-6R1MC-125-ND, Category=Inductor, Mounting Technology=SMT, Product Number=CDEP147NP-6R1MC-125, Supplier=DigiKey, Supplier Link=https://www.digikey.com/en/products/detail/sumida-america-components-inc/CDEP147NP-6R1MC-125/4038408
P?: "TERM BLK 3P SIDE ENT 5.08MM PCB", Part No=EDZ500/3DS, Rated Current=15A, Voltage=300V, Datasheet=http://www.on-shore.com/wp-content/uploads/ED500XDS.pdf, Mounting Technology=HMT, URL=https://www.digikey.com/en/products/detail/on-shore-technology-inc/EDZ500-3DS/250583
Q? Q? Q? Q?: "MOSFET P-CH 20V 2.8A 23SOT", Alternative Supplier Part No=9000037397, Drain-Source Breakdown Voltage=-20V, Drain Current="-2.8A (max.)", Gate-Source Threshold Voltage="-0.69V (typ.)", Max Gate-Source Voltage="12V (abs.)", Package=SOT-23, Supplier Part No=1727-3124-1-ND, Alternative Supplier=Chipdip, Alternative Supplier Link=https://www.chipdip.by/product/pmv65xp.215, Mounting Technology=SMT, Supplier=DigiKey, Supplier Link=https://www.digikey.com/en/products/detail/nexperia-usa-inc/PMV65XP-215/949643
Q? Q?: "MOSFET N-CH 60V 15A", Manufacturer=Toshiba, Package=SO-8FL, Datasheet Link=http://www.farnell.com/datasheets/1339268.pdf, Mounting Technology=SMT
R? R? R? R? R? R? R? R? R? R? R? R? R? R? R? R? R? R? R? R? R? R? R? R? R? R? R? R? R? R? R? R? R? R? R? R? R? R? R? R? R? R? R? R? R? R? R? R? R? R? R? R? R? R? R? R? R? R? R? R? R? R? R? R? R? R? R? R? R? R? R? R? R? R? R? R? R? R? R? R? R? R? R? R? R? R? R? R? R? R? R? R? R? R? R? R? R? R? R? R? R? R? R?: library part R, "Resistor", Manufacturer="Generic Brand", Max Voltage="? V", Power Rating="? W", Tolerance=?, Category=Resistor, Mounting Technology=SMT, Supplier Link=http://
SH? SH? SH? SH? SH? SH?: "Screw Hole D3.0/5.7 T/B"
SW?: "DIP SWITCH SPST 2.54 PITCH RA", Alternative Supplier Part No=9000190955, Manufacturer="Wurth Elektronik", Package=DIP-4, Supplier Part No=732-3832-5-ND, Alternative Supplier=Chipdip, Alternative Supplier Link=https://www.chipdip.by/product/ds1040-02rn, Compatible Product=DS1040-02RN, Mounting Technology=SMT, Product Number=418117270902, Supplier=DigiKey, Supplier Link=https://www.digikey.com/en/products/detail/w%C3%BCrth-elektronik/418117270902/3174485
SW? SW? SW?: "SWITCH TACTILE SPST-NO 0.05A 12V", Manufacturer=C&K, Package=Non-Standard, Supplier Part No=CKN10384CT-ND, Mounting Technology=SMT, Product Number="RS-282G05A3-SM RT", Supplier=DigiKey, Supplier Link=https://www.digikey.com/en/products/detail/c-k/RS-282G05A3-SM-RT/2747190
TP? TP? TP? TP? TP?: library part "Test Point", "Test Point / Pad"
TP? TP? TP? TP? TP? TP? TP? TP? TP? TP? TP? TP? TP? TP? TP? TP? TP? TP? TP? TP? TP? TP? TP? TP? TP? TP? TP? TP? TP? TP? TP? TP? TP? TP? TP? TP? TP? TP? TP? TP? TP? TP? TP? TP? TP?: "Test Point / Pad"
U?: "IC MCU", Manufacturer="Raspberry Pi Foundation", Package=VFQFN-56, Mounting Technology=SMT, Supplier=DigiKey
U?: "IC FLASH 16MBIT SPI/QUAD 8USON"
U?: "IC BUF NON-INVERT 5.5V SOT23-5", Manufacturer="Texas Instruments", Operating Temperature="-40°C ~ 125°C (TA)", Package=SOT-23-5, Supplier Part No=296-11933-1-ND, Manufacturer Product Number=SN74LVC1G17DBVR, Mounting Type=SMT, Supplier Packaging="Cut Tape", Supplier Unit Price=$0.29, Supplier URL=https://www.digikey.com/en/products/detail/texas-instruments/SN74LVC1G17DBVR/389051
U?: "USB 2.0 Hub Controller", Case=QFN-36, Manufacturer=Microchip, Supplier Part No=9000221010, Mounting Type=SMT, Product Name=USB2514B-AEZC, Supplier=Chipdip, Supplier Link=https://www.chipdip.by/product/usb2514b-aezc-microchip
U? U? U? U? U?: "Low Capacitance USB ESD Protection", Case=SOT-23-6, Manufacturer=STMicroelectronics, Supplier Part No=9000039051, Mounting Type=SMT, Product Name=USBLC6-2SC6, Supplier=Chipdip, Supplier Link=https://www.chipdip.by/product/usblc6-2sc6
U? U? U?: "IC GATE AND 1CH 2-INP SOT23-5", Alternative Supplier Part No=9000043235, Manufacturer="Texas Instruments", Package=SOT-23-5, Supplier Part No=296-11601-1-ND, Supply Voltage=1.65V~5.5V, Alternative Supplier=Chipdip, Alternative Supplier Link=https://www.chipdip.by/product/sn74lvc1g08dbvr-2, Mounting Technology=SMT, Product Number=SN74LVC1G08DBVR, Supplier=DigiKey, Supplier Link=https://www.digikey.com/en/products/detail/texas-instruments/SN74LVC1G08DBVR/385718
U? U? U?: "IC PWR SWITCH N-CHAN 1:1 500MA", Manufacturer="Microchip Technology", Package=SOIC-8, Supplier Part No=MIC2075-2YM-CT-ND, Category=IC, Mounting Technology=SMT, Product Number=MIC2075-2YM-TR, Supplier=DigiKey, Supplier Link=https://www.digikey.com/en/products/detail/microchip-technology/MIC2075-2YM-TR/1616766
U?: "IC CURRENT SHUNT MONITOR 16VQFN", Manufacturer="Texas Instruments", Package=VQFN-16, Supplier Part No=296-INA3221AIRGVRCT-ND, Category=IC, Mounting Technology=SMT, Supplier=DigiKey, Supplier Link=https://www.digikey.com/en/products/detail/texas-instruments/INA3221AIRGVR/3588826
U?: library part LM1117, "Voltage Regulator Linear 1% 800mA SOT-223", Case=SOT-223, Manufacturer="Texas Instruments", Supplier Part No=5641124530, Mounting Type=SMT, Product Number=LM1117IMP-3.3, Supplier=Chipdip, Supplier Link=https://www.chipdip.by/product/lm1117imp-3.3-nopb-2, VIN_MAX=+15V, VOUT=+3.3V
U?: "IC COMPARATOR VOLT SGL SOT23-5", Alternative Supplier Part No=9000014932, Manufacturer="Texas Instruments", Package=SOT-23-5, Supplier Part No=LM397MFX/NOPBCT-ND, Alternative Supplier=Chipdip, Alternative Supplier Link=https://www.chipdip.by/product/lm397mf-nopb, Category=IC, Mounting Technology=SMT, Product Number=LM397MFX/NOPB, Supplier=DigiKey, Supplier Link=https://www.digikey.com/en/products/detail/texas-instruments/LM397MFX-NOPB/1871434
U?: "IC REG CTRLR BUCK 16HTSSOP", Manufacturer="Texas Instruments", Package=HTSSOP-16, Supplier Part No=296-26961-1-ND, Mounting Technology=SMT, Product Number=TPS40057PWPR, Supplier=DigiKey, Supplier Link=https://www.digikey.com/en/products/detail/texas-instruments/TPS40057PWPR/1671697
U?: "DGT ISOL 2500VRMS 2CH USB 16SOIC", Alternative Supplier Part No=43702, Manufacturer="Analog Devices Inc.", Package=SOP-16, Supplier Part No=ADUM3160BRWZ-RLCT-ND, Alternative Supplier=Belchip, Alternative Supplier Link=https://belchip.by/product/?selected_product=43702, Mounting Technology=SMT, Product Number=ADUM3160BRWZ-RL, Supplier=DigiKey, Supplier Link=https://www.digikey.com/en/products/detail/analog-devices-inc/ADUM3160BRWZ-RL/2606661
U?: "IC USB SWITCH SGL 1X2 10MSOP", Manufacturer="Texas Instruments", Package=MSOP-10, Supplier Part No=296-25495-1-ND, Category=IC, Mounting Technology=SMT, Product Number=TS3USB30EDGSR, Supplier=DigiKey, Supplier Link=https://www.digikey.com/en/products/detail/texas-instruments/TS3USB30EDGSR/2193086
X?: library part XT-2P, "Crystal Resonator (2 Leads)", Manufacturer="Generic Brand", Tolerance="? ppm", Category=Crystal, Mounting Technology=SMT, Supplier Link=http://
X?: library part XT-4P, "Crystal Resonator (4 Leads)", Manufacturer="Generic Brand", Tolerance="? ppm", Category=Crystal, Mounting Technology=SMT, Supplier Link=http://

## Via types
v1: diameter 0.5, hole 0.2, Top Layer to Bottom Layer, 26 vias

## Nets (pads, with @x,y where several pads share a name; then routed paths per layer and width w, separated by ;. In a path a pad name is that pad's centre, name@x,y a point inside that pad or via, vN(x,y) a via of type N, cw(c..) or ccw(c..) an arc to the next point about the centre after c; other vN are vias at no path point)
3V3: C?.1@154,143.5 C?.1@333,143.5 C?.2@129.75,103 C?.2@132.75,49 C?.2@133.75,103 C?.2@251.75,25 C?.2@255.75,25 C?.2@268.75,49 C?.2@272.75,49 C?.2@277.75,49 C?.2@281.75,49 C?.2@281.75,103 C?.2@285.75,49 C?.2@287.75,82 C?.2@290.75,49 C?.2@303.75,49 J?.1@146,17 J?.1@217,17 J?.1@363,15 R?.1@112.25,82 R?.1@117.25,82 R?.1@121.25,82 R?.1@159.25,49 R?.1@179.25,49 R?.1@208.25,49 R?.1@264.25,25 R?.1@285,102 R?.1@315.25,146 R?.1@317.25,82 R?.1@346.25,25 R?.1@380.25,146 R?.2@119.75,49 R?.2@188,25 R?.2@208.75,25 R?.2@212.75,25 R?.2@247.75,103 R?.2@264.75,49 R?.2@288.75,25 R?.2@292.75,25 R?.2@312.75,146 R?.2@324,25 R?.2@336.75,82 TP?.1@209,103 TP?.1@215,103 U?.1@42.672,32.626 U?.1@275.7,102.95 U?.2@237.1,100 U?.4@242.9,100 U?.4@305.2,80.025 U?.5@33.343,60.198 U?.5@278.3,102.95 U?.8@269.25,22.65 U?.10@34.068,57.473 U?.10@42.672,29.026 U?.10@143,146.2 U?.14@346.75,143.905 U?.15@36.568,57.473 U?.16@346.75,146.445 U?.22@46.31,26.588 U?.23@38.793,60.198 U?.29@37.568,62.923 U?.33@49.547,29.026 U?.36@34.068,62.923 U?.42 U?.44 U?.48 U?.49
5V: C?.2@211,36 C?.2@283.75,82 C?.2@297.75,82 C?.2@340.75,82 C?.P@219.2,79 C?.P@230.2,79 C?.P@241.2,79 D?.2 Q?.3@298.3,101 Q?.3@309.3,101 R?.1@122.25,37 R?.1@127.25,37 R?.1@165.25,37 R?.1@170.25,37 R?.1@250.25,82 R?.1@254.25,82 R?.1@259.25,82 R?.1@321.25,82 R?.2@191.75,82 R?.2@196.75,82 R?.2@200.75,82 TP?.1@197,103 TP?.1@203,103 U?.5@16.928,47.752 U?.5@16.928,77.978 U?.5@26.58,14.986 U?.5@187.3,35.95 U?.5@205.45,34 U?.5@279.3,81.95 U?.5@293.3,81.95 U?.5@332.3,81.95
DCIN: C?.2@279,125 C?.2@284,125 C?.2@289,125 C?.2@336,125 C?.P@303.2,122 C?.P@314.2,122 F?.2@337.727,101 P?.1 R?.2@326,125 R?.2@331,125 U?.15@297.9,124.625
DVDD: U?.23@46.71,26.588 U?.45 U?.50
EXT5V: C?.P@174.2,122 C?.P@185.2,122 L?.2 P?.3 Q?.3@303.3,101 R?.1@123,125 R?.1@167,125 R?.1@270,102 R?.2@195.75,125 TP?.1@186,103 TP?.1@191,103
EXT_PWR_PRSNT: 
GND: C?.1@112.25,69 C?.1@113,36 C?.1@118,36 C?.1@119.25,103 C?.1@123.25,103 C?.1@128.25,103 C?.1@128.25,146 C?.1@131.25,49 C?.1@132.25,103 C?.1@151.25,82 C?.1@156,36 C?.1@156.25,82 C?.1@160.25,82 C?.1@161,36 C?.1@163.25,69 C?.1@167.25,69 C?.1@199.25,49 C?.1@203,125 C?.1@204.25,49 C?.1@208,125 C?.1@209,36 C?.1@212.25,49 C?.1@217.25,49 C?.1@218.25,69 C?.1@222.25,69 C?.1@234.25,49 C?.1@248.25,49 C?.1@250.25,25 C?.1@252,125 C?.1@254.25,25 C?.1@261.25,103 C?.1@267.25,49 C?.1@271.25,49 C?.1@272.25,69 C?.1@276.25,49 C?.1@277,125 C?.1@280.25,49 C?.1@280.25,103 C?.1@282,125 C?.1@282.25,82 C?.1@284.25,49 C?.1@286.25,82 C?.1@287,125 C?.1@289.25,49 C?.1@296,25 C?.1@296.25,82 C?.1@301,25 C?.1@302.25,49 C?.1@325.25,82 C?.1@331.25,25 C?.1@339.25,82 C?.1@371.25,146 C?.2@142.75,25 C?.2@154,146.5 C?.2@161.75,25 C?.2@170.75,25 C?.2@199,146.5 C?.2@264.75,82 C?.2@268.75,82 C?.2@273.75,82 C?.2@333,146.5 C?.N D?.A@161,124.239 D?.C@128,125 D?.C@154,69 D?.C@209,69 D?.C@251,102 D?.C@263,69 J?.1@113,102 J?.2@326,95.994 J?.3@146,22.08 J?.3@217,22.08 J?.3@321.301,92.997 J?.3@363,20.08 J?.4@17.188,27.742 J?.4@17.188,56.698 J?.4@17.188,87.432 J?.4@166.25,143.355 P?.2 R?.1@117.25,69 R?.1@122.25,49 R?.1@124.25,146 R?.1@127.25,49 R?.1@163.25,49 R?.1@164.25,82 R?.1@171.25,69 R?.1@173.25,82 R?.1@182.25,82 R?.1@195.25,49 R?.1@226.25,69 R?.1@229.25,49 R?.1@247,125 R?.1@257,125 R?.2@115,125 R?.2@267,102 SH?.1 SW?.1@181,17.1 SW?.2@308,24.9 SW?.2@352,24.9 TP?.1@221,103 TP?.1@226,103 U?.1@237.1,102.3 U?.2@147.7,68 U?.2@192.7,145 U?.2@202.7,68 U?.2@257.7,68 U?.2@275.7,102 U?.3@125.3,79.365 U?.3@134.3,79.365 U?.3@143.3,79.365 U?.3@184.7,34.05 U?.3@276.7,80.05 U?.3@290.7,80.05 U?.3@305.2,80.675 U?.3@329.7,80.05 U?.4@270.75,25.35 U?.5@145,141.8 U?.5@292.1,122.675 U?.5@306.025,79.2 U?.6@16.928,49.352 U?.6@16.928,79.578 U?.6@26.58,16.586 U?.6@205.45,35.6 U?.9@143.5,146.2 U?.9@297.9,120.725 U?.9@346.75,137.555 U?.11@34.568,57.473 U?.15@346.75,145.175 U?.19@45.11,26.588 U?.37@36.068,60.198 U?.57
  other v1: 45.01,28.926 46.109,28.926 47.209,28.926 45.01,30.026 46.109,30.026 47.209,30.026 45.01,31.126 46.109,31.126 47.209,31.126 34.968,59.098 36.068,59.098 37.168,59.098 34.968,60.198 36.068,60.198 37.168,60.198 34.968,61.298 36.068,61.298 37.168,61.298
GND_ISO: C?.1@221.25,146 C?.2@320,146.5 C?.2@329,146.5 D?.C@362,146 J?.4@260.25,143.355 R?.1@217.25,146 TP?.1@351,146 TP?.1@357,146 U?.2@285.7,145 U?.2@337.25,145.175 U?.4@337.25,142.635 U?.8@337.25,137.555
HUB_NRST: C?.2@249.75,49 R?.1@263.25,49 R?.2@328.75,25 TP?.1@243,49 U?.16@43.91,26.588 U?.26@38.793,61.698
HUB_SCL: R?.1@211.25,25 TP?.1@196,25 U?.7@42.672,30.226 U?.24@38.793,60.698
HUB_SDA: R?.1@207.25,25 TP?.1@202,25 U?.5@42.672,31.026 U?.6@42.672,30.626 U?.22@38.793,59.698
IN1N: C?.1@203.25,82 C?.2@152.75,82 R?.2@170.75,82 U?.11@308.8,81.325
IN1P: C?.1@263.25,82 C?.2@204.75,82 R?.2@251.75,82 U?.12@308.8,81.975
IN2N: C?.1@208.25,82 C?.2@157.75,82 R?.2@178.75,82 U?.14@307.325,82.8
IN2P: C?.1@267.25,82 C?.2@209.75,82 R?.2@255.75,82 U?.15@306.675,82.8
IN3N: C?.1@212.25,82 C?.2@161.75,82 R?.2@187.75,82 U?.1@305.2,81.975
IN3P: C?.1@272.25,82 C?.2@213.75,82 R?.2@260.75,82 U?.2@305.2,81.325
INAFLT: D?.C@312,82 R?.2@318.75,82 U?.8@307.975,79.2 U?.9@308.8,80.025 U?.11@42.672,28.626 U?.13@307.975,82.8
ISO_PRT_PRSNT_N: C?.2@372.75,146 R?.2@381.75,146 TP?.1@385,146 U?.4@42.672,31.426 U?.12@42.672,28.226
MOD_A: R?.2@128,25 U?.13@42.672,27.826
MOD_B: R?.2@115,25 U?.14@42.672,27.426
NetC?_1: C?.1@169.25,25 R?.1@165,25 R?.2@157,25 X?.1@149.75,25
NetC?_2: C?.2@298,25 C?.2@303,25 R?.1@322,25 U?.43
NetD?_3: D?.3 R?.2@233.75,103
NetD?_A: D?.A@265,69 R?.2@269.75,69
NetF?_1: F?.1@334.273,101 J?.1@326,90
NetJ?_2: J?.2@146,19.54 R?.2@138,25
NetJ?_4: J?.4@146,24.62 R?.2@133,25
NetQ?_1: R?.2@264,125
NetQ?_2: Q?.2@300.7,100.05 Q?.2@306.7,100.05
NetR?_1: R?.1@317,25 U?.46
NetR?_2: R?.2@167,25 U?.21@45.909,26.588
NetTP?_1: TP?.1@132,36 U?.1@12.028,49.352
NetU?_1: U?.1@12.028,79.578 U?.2@21.68,14.986
NRST: J?.5 R?.2@336.75,25
PRT1_EN: R?.2@165.75,82 U?.1@125.3,81.905 U?.4@332.3,80.05
PRT2_EN: R?.2@174.75,82 U?.1@134.3,81.905 U?.4@293.3,80.05
PRT3_EN: R?.2@183.75,82 U?.1@143.3,81.905 U?.4@279.3,80.05
PRT.ESD1_N: R?.1@253.25,69 U?.4@260.3,67.05
PRT.ESD1_P: R?.1@231.25,69 U?.6@260.3,68.95
PRT.ESD2_N: R?.1@198.25,69 U?.4@205.3,67.05
PRT.ESD2_P: R?.1@176.25,69 U?.6@205.3,68.95
PRT.ESD3_N: R?.1@144.25,69 U?.4@150.3,67.05
PRT.ESD3_P: R?.1@121.25,69 U?.6@150.3,68.95
PRT.R1_N: J?.2@17.188,32.242 R?.2@254.75,69
PRT.R1_P: J?.3@17.188,30.242 R?.2@232.75,69
PRT.R2_N: J?.2@17.188,61.198 R?.2@199.75,69
PRT.R2_P: J?.3@17.188,59.198 R?.2@177.75,69
PRT.R3_N: J?.2@17.188,91.932 R?.2@145.75,69
PRT.R3_P: J?.3@17.188,89.932 R?.2@122.75,69
PRTFAULT1: R?.2@113.75,82 TP?.1@184,49 U?.2@125.3,80.635 U?.13@35.568,57.473 U?.31@49.547,28.226
PRTFAULT2: R?.2@118.75,82 TP?.1@168,49 U?.2@134.3,80.635 U?.17@37.568,57.473 U?.32@49.547,28.626
PRTFAULT3: R?.2@122.75,82 TP?.1@148,49 U?.2@143.3,80.635 U?.19@38.793,58.198 U?.34@49.547,29.426
PRTFAULT4: R?.2@209.75,49 TP?.1@136,49 U?.21@38.793,59.198
PRTPWR1: TP?.1@190,49 U?.1@329.7,81.95 U?.12@35.068,57.473
PRTPWR2: TP?.1@174,49 U?.1@290.7,81.95 U?.16@37.068,57.473
PRTPWR3: TP?.1@154,49 U?.1@276.7,81.95 U?.18@38.068,57.473
PRTPWR4: TP?.1@142,49 U?.20@38.793,58.698
PRTSWBTN: C?.1@160.25,25 R?.1@186,25 SW?.2@181,24.9
QSPI_CLK: U?.6@270.25,22.65 U?.52
QSPI_NSS: R?.2@265.75,25 R?.2@274.75,25 U?.1@269.25,25.35 U?.56
QSPI_SD0: U?.5@270.75,22.65 U?.53
QSPI_SD1: U?.2@269.75,25.35 U?.55
QSPI_SD2: U?.3@270.25,25.35 U?.54
QSPI_SD3: U?.7@269.75,22.65 U?.51
RUN: C?.2@332.75,25 R?.1@327.25,25 R?.1@335.25,25 R?.2@347.75,25 SW?.1@352,17.1 U?.26@47.91,26.588
RXD: R?.1@131,25 U?.3@42.672,31.826
SCL: J?.4@217,24.62 R?.1@291.25,25 TP?.1@244,25 U?.6@306.675,79.2 U?.9@42.672,29.426
SDA: J?.2@217,19.54 R?.1@287.25,25 TP?.1@259,25 U?.7@307.325,79.2 U?.8@42.672,29.826
SHIELD: C?.2@129.75,146 J?.SH@158.98,140.645 J?.SH@171.02,140.645 R?.2@125.75,146
SHIELDISO: C?.2@222.75,146 J?.SH@252.98,140.645 J?.SH@265.02,140.645 R?.2@218.75,146
SWCLK: J?.2@363,17.54 U?.24@47.109,26.588
SWDIO: J?.4@363,22.62 U?.25@47.51,26.588
TXD: R?.1@136,25 U?.2@42.672,32.226
UDPSHLD.1: C?.2@223.75,69 J?.SH@14.478,24.672 J?.SH@14.478,37.812 R?.2@227.75,69
UDPSHLD.2: C?.2@168.75,69 J?.SH@14.478,53.628 J?.SH@14.478,66.768 R?.2@172.75,69
UDPSHLD.3: C?.2@113.75,69 J?.SH@14.478,84.362 J?.SH@14.478,97.502 R?.2@118.75,69
UPRTSWITCH: TP?.1@180,146 U?.1@143,141.8 U?.17@44.309,26.588
USBDN1_N: U?.1@33.343,62.198 U?.3@257.7,67.05
USBDN1_P: U?.1@257.7,68.95 U?.2@33.343,61.698
USBDN2_N: U?.3@33.343,61.198 U?.3@202.7,67.05
USBDN2_P: U?.1@202.7,68.95 U?.4@33.343,60.698
USBDN3_N: U?.3@147.7,67.05 U?.6@33.343,59.698
USBDN3_P: U?.1@147.7,68.95 U?.7@33.343,59.198
USBDN4_N: R?.2@319,25 U?.8@33.343,58.698
USBDN4_P: R?.2@314,25 U?.9@33.343,58.198
USBDNEN1: TP?.1@366,25 U?.2@329.7,81 U?.35@49.547,29.826
USBDNEN2: TP?.1@356,25 U?.2@290.7,81 U?.36@49.547,30.226
USBDNEN3: TP?.1@340,25 U?.2@276.7,81 U?.37@49.547,30.626
USBHUB_N: R?.2@274.75,146 R?.2@325.75,146 TP?.1@113,146 U?.6@145,146.2 U?.30@37.068,62.923
USBHUB_P: R?.2@237.75,146 R?.2@302.75,146 TP?.1@119,146 U?.4@144.5,141.8 U?.31@36.568,62.923
USBISO_N: R?.2@214.75,146 TP?.1@231,146 U?.1@285.7,145.95 U?.6@337.25,140.095
USBISO_P: R?.2@204.75,146 TP?.1@208,146 U?.3@285.7,144.05 U?.7@337.25,138.825
USBUP1_N: R?.1@213.25,146 R?.1@324.25,146 TP?.1@247,146 U?.8@144,146.2 U?.11@346.75,140.095
USBUP1_P: R?.1@203.25,146 R?.1@301.25,146 TP?.1@241,146 U?.2@143.5,141.8 U?.10@346.75,138.825
USBUP2_N: R?.1@273.25,146 TP?.1@148,146 U?.1@192.7,145.95 U?.7@144.5,146.2
USBUP2_P: R?.1@236.25,146 TP?.1@133,146 U?.3@144,141.8 U?.3@192.7,144.05
USBUP_N: J?.2@163.75,145.355 R?.2@176.75,146
USBUP_P: J?.3@163.75,143.355 R?.2@139.75,146
USBUPESD_N: R?.1@175.25,146 U?.6@195.3,145.95
USBUPESD_P: R?.1@138.25,146 U?.4@195.3,144.05
USBUPISO_N: J?.2@257.75,145.355 R?.2@270.75,146
USBUPISO_P: J?.3@257.75,143.355 R?.2@227.75,146
USBUPISOESD_N: R?.1@269.25,146 U?.6@288.3,145.95
USBUPISOESD_P: R?.1@226.25,146 U?.4@288.3,144.05
VBUS: C?.1@199,143.5 D?.1 F?.2@189.727,145 Q?.3@292.3,101 R?.2@259.75,49 U?.5@195.3,145
VBUS.PRT1: C?.2@273.75,69 J?.1@17.188,34.742 R?.1@268.25,69 U?.5@260.3,68 U?.6@130.7,79.365 U?.8@130.7,81.905
VBUS.PRT2: C?.2@219.75,69 J?.1@17.188,63.698 R?.1@213.25,69 U?.5@205.3,68 U?.6@139.7,79.365 U?.8@139.7,81.905
VBUS.PRT3: C?.2@164.75,69 J?.1@17.188,94.432 R?.1@158.25,69 U?.5@150.3,68 U?.6@148.7,79.365 U?.8@148.7,81.905
VBUS_ISO: C?.1@320,143.5 C?.1@329,143.5 F?.2@281.727,145 R?.1@291.25,146 R?.1@367.25,146 R?.1@376.25,146 TP?.1@306,146 U?.1@337.25,146.445 U?.3@337.25,143.905 U?.5@288.3,145
VBUSDET: C?.2@235.75,49 R?.1@258.25,49 R?.2@193,25 R?.2@230.75,49 TP?.1@253,49 U?.27@38.793,62.198
VPU: C?.2@326.75,82 R?.1@300.25,82 R?.2@322.75,82 U?.16@306.025,82.8
WSDAT3V3: TP?.1@174,25 U?.2@184.7,35 U?.18@44.709,26.588
pads on no net: C?.1@118,125 C?.1@138,125 C?.1@141.25,25 C?.1@143,125 C?.1@272,125 C?.1@334,125 C?.2@115,36 C?.2@120,36 C?.2@120,125 C?.2@120.75,103 C?.2@124.75,103 C?.2@140,125 C?.2@145,125 C?.2@158,36 C?.2@163,36 C?.2@200.75,49 C?.2@205,125 C?.2@205.75,49 C?.2@210,125 C?.2@213.75,49 C?.2@218.75,49 C?.2@254,125 C?.2@262.75,103 C?.2@274,125 D?.A@130,125 D?.A@156,69 D?.A@211,69 D?.A@253,102 D?.A@314,82 D?.A@364,146 D?.C@161,117.762 F?.1@186.273,145 F?.1@278.273,145 J?.1@166.25,145.355 J?.1@260.25,145.355 J?.2@115.54,102 L?.1 L?.MO Q?.1 Q?.2@289.7,100.05 Q?.2@295.7,100.05 R?.1@113,25 R?.1@113,125 R?.1@118.25,49 R?.1@126,25 R?.1@133,125 R?.1@154,125 R?.1@155,25 R?.1@169.25,82 R?.1@174,36 R?.1@177.25,82 R?.1@186.25,82 R?.1@190.25,82 R?.1@191,25 R?.1@194.25,125 R?.1@195.25,82 R?.1@199.25,82 R?.1@219,125 R?.1@232.25,103 R?.1@238.25,49 R?.1@246.25,103 R?.1@262,125 R?.1@265,102 R?.1@273.25,25 R?.1@311.25,146 R?.1@312,25 R?.1@324,125 R?.1@329,125 R?.1@335.25,82 R?.2@123.75,37 R?.2@123.75,49 R?.2@125,125 R?.2@128.75,37 R?.2@128.75,49 R?.2@135,125 R?.2@156,125 R?.2@159.75,69 R?.2@160.75,49 R?.2@164.75,49 R?.2@166.75,37 R?.2@169,125 R?.2@171.75,37 R?.2@176,36 R?.2@180.75,49 R?.2@196.75,49 R?.2@214.75,69 R?.2@221,125 R?.2@239.75,49 R?.2@249,125 R?.2@259,125 R?.2@272,102 R?.2@287,102 R?.2@292.75,146 R?.2@301.75,82 R?.2@316.75,146 R?.2@368.75,146 R?.2@377.75,146 SW?.1@308,17.1 SW?.1A SW?.1B SW?.2A SW?.2B TP?.1@113,49 TP?.1@148,125 TP?.1@179,37 TP?.1@213,125 TP?.1@221,25 TP?.1@224,125 TP?.1@226,25 TP?.1@232,25 TP?.1@238,25 TP?.1@296,146 U?.1@21.68,16.586 U?.1@184.7,35.95 U?.1@200.55,35.6 U?.1@292.1,125.275 U?.2@12.028,47.752 U?.2@12.028,77.978 U?.2@200.55,34 U?.2@292.1,124.625 U?.3@12.028,46.152 U?.3@12.028,76.378 U?.3@21.68,13.386 U?.3@200.55,32.4 U?.3@237.1,97.7 U?.3@275.7,101.05 U?.3@292.1,123.975 U?.4@16.928,46.152 U?.4@16.928,76.378 U?.4@26.58,13.386 U?.4@125.3,78.095 U?.4@134.3,78.095 U?.4@143.3,78.095 U?.4@187.3,34.05 U?.4@205.45,32.4 U?.4@278.3,101.05 U?.4@292.1,123.325 U?.5@130.7,78.095 U?.5@139.7,78.095 U?.5@148.7,78.095 U?.5@337.25,141.365 U?.6@292.1,122.025 U?.7@130.7,80.635 U?.7@139.7,80.635 U?.7@148.7,80.635 U?.7@292.1,121.375 U?.8@292.1,120.725 U?.10@297.9,121.375 U?.10@308.8,80.675 U?.11@297.9,122.025 U?.12@297.9,122.675 U?.12@346.75,141.365 U?.13@297.9,123.325 U?.13@346.75,142.635 U?.14@36.068,57.473 U?.14@297.9,123.975 U?.15@43.509,26.588 U?.16@297.9,125.275 U?.17@295,123 U?.17@307,81 U?.20@45.51,26.588 U?.25@38.793,61.198 U?.27@48.309,26.588 U?.28 U?.29@49.547,27.426 U?.30@49.547,27.826 U?.32@36.068,62.923 U?.33@35.568,62.923 U?.34@35.068,62.923 U?.35@34.568,62.923 U?.38 U?.39 U?.40 U?.41 U?.47 U?.PAD X?.1@222.15,46.9 X?.2 X?.3 X?.4
copper on no net:
  other v1: 306.45,80.45 307.55,80.45 306.45,81.55 307.55,81.55 294.45,122.45 295.55,122.45 294.45,123.55 295.55,123.55

## Silkscreen, mask and mechanical layers (free items; w line width, h text height)
Top Overlay:
  lines w0.254: 63,77 63,109 109,109 109,77 63,77
Mechanical 1:
  the board outline again, w0.254

## Text inside footprints (layer, text, board x,y; h text height)
F?: Top Overlay "F" at 279.518,144.238 h1.52
F?: Top Overlay "F" at 187.518,144.238 h1.52
F?: Top Overlay "F" at 335.518,100.238 h1.52